# EAGLE board 8iSwitches (EAGLE 6.6.0)
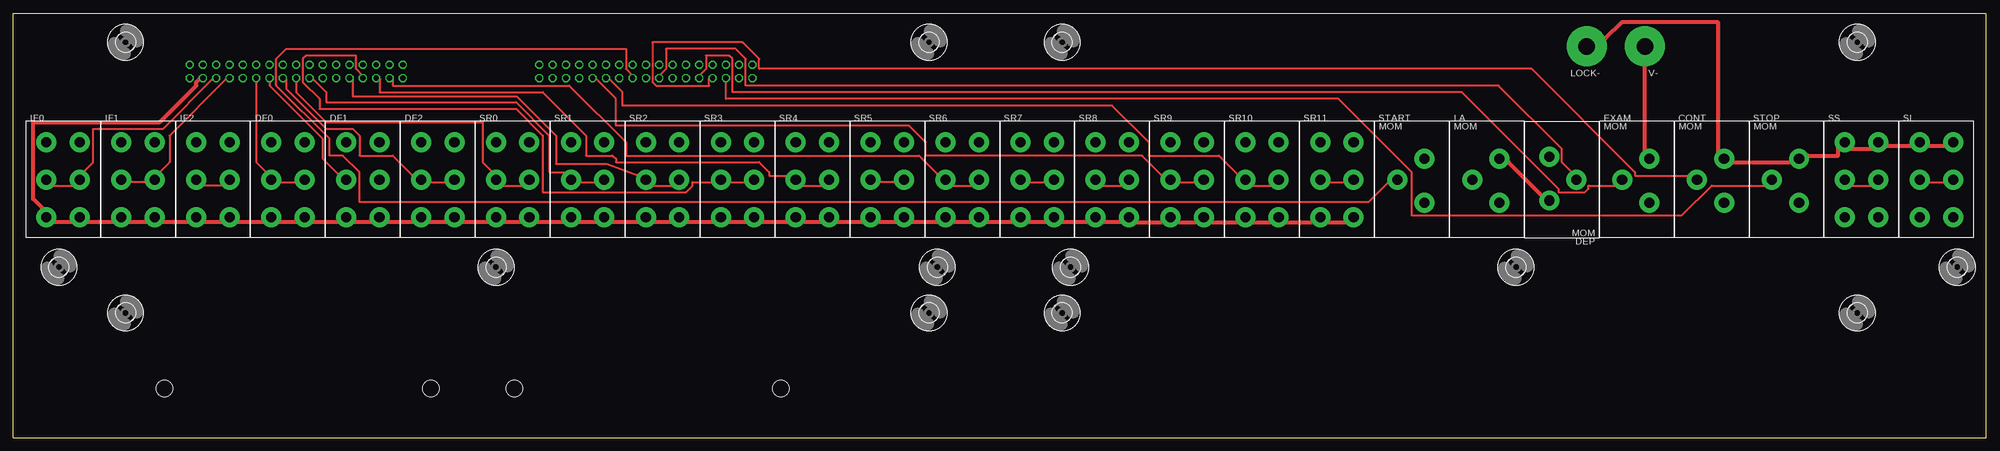
[diagram p0: board, top side]
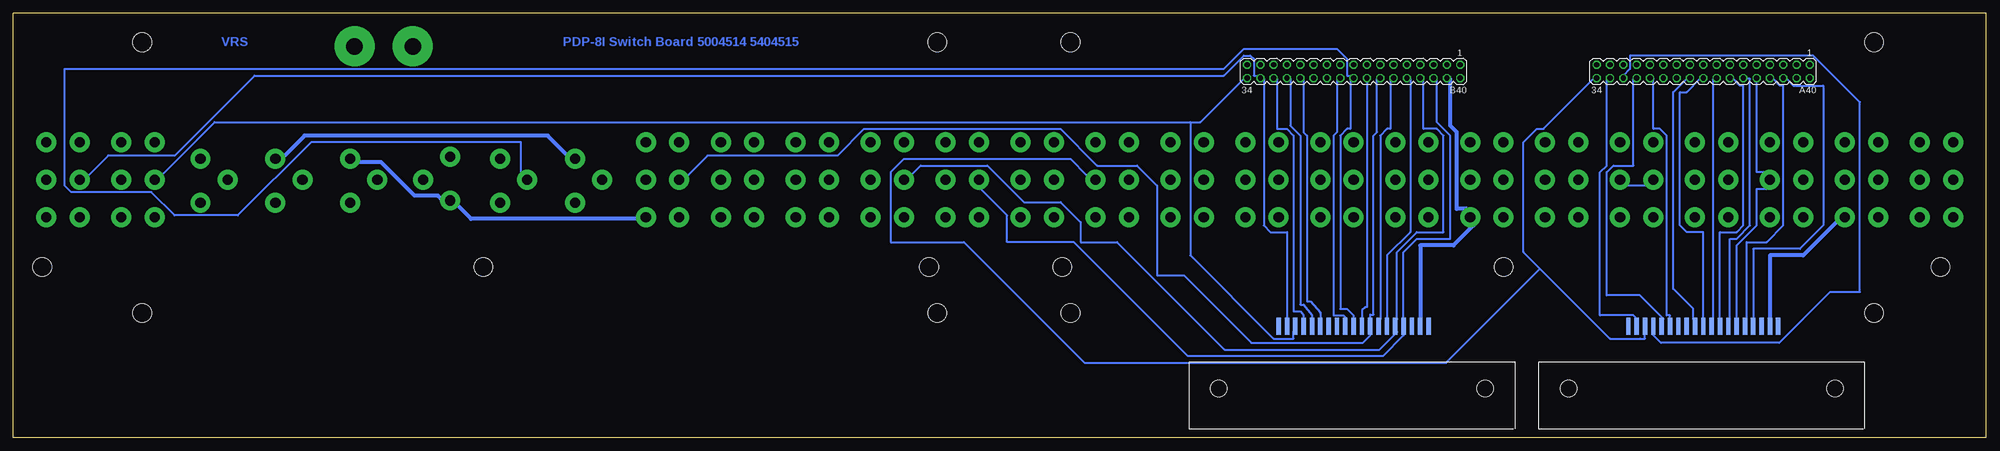
[diagram p1: board, bottom side, seen from below]

Size 376.24 x 80.96 mm. Coordinates in mm from the lower left corner, seen from the top.
Outline: 0,0 0,0
Outline: 0,0 0,0
Outline: 0,0 376.24,0 376.24,80.96 0,80.96 0,0
Copper layers (1*16): Top 0.035mm / dielectric 1.5mm / Bottom 0.035mm
Design rules "15mils": minimum track width 15mil, minimum drill 24mil, track to track 15mil, track to pad 10mil, pad to pad 10mil, via to via 10mil, smd to smd 10mil, copper to edge 25mil, drill to drill 10mil, minimum pad ring 10mil, minimum via ring 8mil, stop-mask expansion 0mil, vias tented up to drill 0mil, thermal gap 10mil
Net classes: 1 supply: width 0.762 mm

## Footprints (pad centres in the part's own frame; a part is rotated, then mirrored left to right if it is on the bottom)
MA17-2 = drill 1.016 octagon: 1 -20.32,-1.27; 2 -20.32,1.27; 3 -17.78,-1.27; 4 -17.78,1.27; 5 -15.24,-1.27; 6 -15.24,1.27; 7 -12.7,-1.27; 8 -12.7,1.27; 9 -10.16,-1.27; 10 -10.16,1.27; 11 -7.62,-1.27; 12 -7.62,1.27; 13 -5.08,-1.27; 14 -5.08,1.27; 15 -2.54,-1.27; 16 -2.54,1.27; 17 0,-1.27; 18 0,1.27; 19 2.54,-1.27; 20 2.54,1.27; 21 5.08,-1.27; 22 5.08,1.27; 23 7.62,-1.27; 24 7.62,1.27; 25 10.16,-1.27; 26 10.16,1.27; 27 12.7,-1.27; 28 12.7,1.27; 29 15.24,-1.27; 30 15.24,1.27; 31 17.78,-1.27; 32 17.78,1.27; 33 20.32,-1.27; 34 20.32,1.27
SPDT8I = drill 1.93 pad 3.81: A1 2.381,3.969; A2 -2.778,0; A3 2.381,-4.366
DPDT8I = drill 1.93 pad 3.81: L1 -3.175,7.144; L2 -3.175,0; L3 -3.175,-7.144; R1 3.175,7.144; R2 3.175,0; R3 3.175,-7.144
FLEX19 = smd 3.175 x 0.838: 1 0,14.287; 2 0,12.7; 3 0,11.113; 4 0,9.525; 5 0,7.938; 6 0,6.35; 7 0,4.763; 8 0,3.175; 9 0,1.587; 10 0,0; 11 0,-1.587; 12 0,-3.175; 13 0,-4.763; 14 0,-6.35; 15 0,-7.938; 16 0,-9.525; 17 0,-11.113; 18 0,-12.7; 19 0,-14.287
SPADELUG = drill 3.175 pad 7.62: 1 0,0
3,6 = hole 3.6: 0,0
STRAIN-RELIEF = hole 3.175: 7.62,56.515; 7.62,5.715

## Placement (x,y rotation side)
A40  [MA17-2]  53.98,69.85 180 bottom
B40  [MA17-2]  120.65,69.85 180 bottom
CONT  SPDT8I  [SPDT8I]  323.85,49.21 0 top
DEP  SPDT8I  [SPDT8I]  295.28,49.21 180 top
DF0  DPDT8I  [DPDT8I]  52.39,49.21 0 top
DF1  DPDT8I  [DPDT8I]  66.68,49.21 0 top
DF2  DPDT8I  [DPDT8I]  80.96,49.21 0 top
EXAM  SPDT8I  [SPDT8I]  309.56,49.21 0 top
FLEXA  FLEX19  [FLEX19]  53.98,21.27 90 bottom
FLEXB  FLEX19  [FLEX19]  120.65,21.27 90 bottom
IF0  DPDT8I  [DPDT8I]  9.53,49.21 0 top
IF1  DPDT8I  [DPDT8I]  23.81,49.21 0 top
IF2  DPDT8I  [DPDT8I]  38.1,49.21 0 top
LA  SPDT8I  [SPDT8I]  280.99,49.21 0 top
LOCK-  LUG  [SPADELUG]  300.04,74.61 180 top
SI  DPDT8I  [DPDT8I]  366.71,49.21 0 top
SR0  DPDT8I  [DPDT8I]  95.25,49.21 0 top
SR1  DPDT8I  [DPDT8I]  109.54,49.21 0 top
SR2  DPDT8I  [DPDT8I]  123.83,49.21 0 top
SR3  DPDT8I  [DPDT8I]  138.11,49.21 0 top
SR4  DPDT8I  [DPDT8I]  152.4,49.21 0 top
SR5  DPDT8I  [DPDT8I]  166.69,49.21 0 top
SR6  DPDT8I  [DPDT8I]  180.98,49.21 0 top
SR7  DPDT8I  [DPDT8I]  195.26,49.21 0 top
SR8  DPDT8I  [DPDT8I]  209.55,49.21 0 top
SR9  DPDT8I  [DPDT8I]  223.84,49.21 0 top
SR10  DPDT8I  [DPDT8I]  238.13,49.21 0 top
SR11  DPDT8I  [DPDT8I]  252.41,49.21 0 top
SS  DPDT8I  [DPDT8I]  352.43,49.21 0 top
START  SPDT8I  [SPDT8I]  266.7,49.21 0 top
STOP  SPDT8I  [SPDT8I]  338.14,49.21 0 top
U$1  [3,6]  201.61,32.54 0 top
U$2  [3,6]  200.03,23.81 0 top
U$3  [3,6]  286.54,32.54 0 top
U$4  [3,6]  200.03,75.41 0 top
U$5  [3,6]  351.63,75.41 0 top
U$6  [3,6]  370.68,32.54 0 top
U$7  [3,6]  351.63,23.81 0 top
U$10  [3,6]  176.21,32.54 0 top
U$11  [3,6]  174.63,23.81 0 top
U$12  [3,6]  174.63,75.41 0 top
U$13  [3,6]  21.43,75.41 0 top
U$14  [3,6]  21.43,23.81 0 top
U$15  [3,6]  8.73,32.54 0 top
U$16  [3,6]  92.08,32.54 0 top
U$17  [STRAIN-RELIEF]  89.85,1.75 90 bottom
U$18  [STRAIN-RELIEF]  23.18,1.75 90 bottom
V-  LUG  [SPADELUG]  311.15,74.61 180 top

## Library data of the parts
A40 B40 = con-lstb; OC_FARNELL: unknown; OC_NEWARK: unknown
CONT DEP DF0 DF1 DF2 EXAM FLEXA FLEXB IF0 IF1 IF2 LA LOCK- SI SR0 SR1-SR11 SS START STOP U$17 U$18 V- = dec-con
U$1-U$7 U$10-U$16 = holes

## Nets
CONT: B40.28 CONT.A2 FLEXB.5
DEP: B40.20 DEP.A2 FLEXB.9
DF0: A40.6 FLEXA.16 IF0.L2 IF0.R2
DF1: A40.8 FLEXA.15 IF1.L2 IF1.R2
DF2: A40.10 FLEXA.14 IF2.L2 IF2.R2
EXAM: B40.26 EXAM.A2 FLEXB.6
IF0: A40.12 DF0.L2 DF0.R2 FLEXA.13
IF1: A40.14 DF1.L2 DF1.R2 FLEXA.12
IF2: A40.16 DF2.L2 DF2.R2 FLEXA.11
LA: B40.18 FLEXB.10 LA.A2
LOCK- [supply]: CONT.A1 LOCK-.1 SI.L1 SI.R1 SS.L1 SS.R1 START.A1 STOP.A1
SI: B40.32 FLEXB.2 SI.L2 SI.R2
SR0: A40.18 FLEXA.10 SR0.L2 SR0.R2
SR1: A40.20 FLEXA.9 SR1.L2 SR1.R2
SR2: A40.26 FLEXA.6 SR2.L2 SR2.R2
SR3: A40.28 FLEXA.5 SR3.L2 SR3.R2
SR4: A40.30 FLEXA.4 SR4.L2 SR4.R2
SR5: A40.34 FLEXA.3 SR5.L2 SR5.R2
SR6: A40.32 FLEXA.2 SR6.L2 SR6.R2
SR7: B40.6 FLEXB.16 SR7.L2 SR7.R2
SR8: B40.8 FLEXB.15 SR8.L2 SR8.R2
SR9: B40.10 FLEXB.14 SR9.L2 SR9.R2
SR10: B40.12 FLEXB.13 SR10.L2 SR10.R2
SR11: B40.14 FLEXB.12 SR11.L2 SR11.R2
SS: B40.34 FLEXB.3 SS.L2 SS.R2
START: B40.16 FLEXB.11 START.A2
STOP: B40.30 FLEXB.4 STOP.A2
V- [supply]: A40.4 B40.4 DEP.A1 DF0.L3 DF0.R3 DF1.L3 DF1.R3 DF2.L3 DF2.R3 EXAM.A1 FLEXA.18 FLEXB.18 IF0.L3 IF0.R3 IF1.L3 IF1.R3 IF2.L3 IF2.R3 LA.A1 SR0.L3 SR0.R3 SR1.L3 SR1.R3 SR2.L3 SR2.R3 SR3.L3 SR3.R3 SR4.L3 SR4.R3 SR5.L3 SR5.R3 SR6.L3 SR6.R3 SR7.L3 SR7.R3 SR8.L3 SR8.R3 SR9.L3 SR9.R3 SR10.L3 SR10.R3 SR11.L3 SR11.R3 V-.1

## Tracks (layer width: path | path; a pad name or v marks a point on that pad's centre or on a via)
CONT
  Top 0.381: CONT.A2 319.41,50.01 309.25,50.01 309.25,50.64 289.56,70.33 142.24,70.33 142.24,72.23 139.07,75.41 121.92,75.41 121.92,67.79 122.56,67.15 132.72,67.15 132.72,68.42 B40.28
  Bottom 0.381: B40.28 132.72,68.42 132.72,59.53 130.81,57.63 130.81,25.4 130.18,25.4 128.59,23.34 FLEXB.5
DEP
  Top 0.381: DEP.A2 297.18,50.64 295.28,52.55 295.28,55.09 283.21,67.15 139.7,67.15 139.7,72.23 137.8,74.14 124.46,74.14 124.46,70.33 123.19,69.06 B40.20
  Bottom 0.381: B40.20 123.83,68.42 123.83,58.26 124.46,57.63 124.46,23.34 122.56,23.34 122.24,23.02 FLEXB.9
DF0
  Top 0.381: A40.6 38.1,68.42 28.58,58.9 15.24,58.9 15.24,52.55 13.34,50.64 IF0.R2 11.43,48.1 7.62,48.1 IF0.L2
  Bottom 0.381: FLEXA.16 44.45,22.7 44.45,36.04 35.56,36.04 31.12,40.48 31.12,67.15 36.83,67.15 38.1,68.42 A40.6
DF1
  Top 0.381: A40.8 40.64,68.42 29.85,57.63 29.85,52.55 27.94,50.64 IF1.R2 25.4,48.74 22.23,48.74 IF1.L2
  Bottom 0.381: FLEXA.15 45.72,22.7 45.72,37.31 41.91,37.31 38.74,40.48 38.74,67.15 39.37,67.15 40.64,68.42 A40.8
DF2
  Top 0.381: IF2.L2 36.2,48.1 40.01,48.1 IF2.R2
  Bottom 0.381: A40.10 43.82,68.42 43.82,50.64 41.91,50.64 IF2.R2 41.91,47.47 43.82,47.47 43.82,40.48 47.63,36.67 47.63,22.7 FLEXA.14
EXAM
  Top 0.381: EXAM.A2 305.44,48.1 300.36,48.1 300.36,47.47 299.72,46.83 294.64,46.83 294.64,47.47 276.23,65.88 137.16,65.88 137.16,72.23 136.53,72.87 132.08,72.87 132.08,70.33 130.81,69.06 B40.26
  Bottom 0.381: B40.26 130.18,68.42 130.18,58.26 129.54,57.63 129.54,26.04 128.91,26.04 127,23.81 127,22.7 FLEXB.6
IF0
  Top 0.381: A40.12 46.36,68.42 46.36,52.55 48.26,50.64 DF0.L2 50.8,48.74 53.98,48.74 DF0.R2
  Bottom 0.381: FLEXA.13 48.9,22.7 48.9,37.94 47.63,37.94 45.09,40.48 45.09,68.42 45.72,68.42 A40.12
IF1
  Top 0.381: A40.14 48.9,68.42 48.9,67.15 59.06,56.99 59.06,53.18 62.23,50.01 DF1.L2
  Bottom 0.381: FLEXA.12 50.8,22.7 50.8,39.21 47.63,39.21 46.36,40.48 46.36,67.15 46.99,67.15 48.26,68.42 A40.14 | DF1.R2 68.58,48.1 64.77,48.1 DF1.L2
IF2
  Top 0.381: DF2.R2 82.55,48.74 79.38,48.74 DF2.L2 76.2,50.01 72.39,53.82 66.04,53.82 66.04,57.63 64.77,58.9 59.69,58.9 52.07,66.52 52.07,68.42 A40.16
  Bottom 0.381: A40.16 52.07,68.42 52.07,22.7 FLEXA.11
LA
  Bottom 0.381: FLEXB.10 120.65,22.7 120.65,23.34 121.92,24.61 123.19,24.61 123.19,57.63 121.92,58.9 121.29,58.9 121.29,68.42 B40.18 120.65,69.06 121.92,69.06 121.92,72.23 123.83,74.14 141.61,74.14 145.42,70.33 366.4,70.33 366.4,48.1 365.13,46.83 349.89,46.83 345.44,42.39 333.38,42.39 319.41,56.36 279.4,56.36 279.4,50.64 LA.A2
LOCK-
  Top 0.762: SI.R1 368.3,55.72 365.13,55.72 SI.L1 361.95,55.72 356.87,55.72 SS.R1 354.33,55.09 350.52,55.09 SS.L1 347.98,55.09 347.98,53.82 342.27,53.82 STOP.A1 339.09,52.55 327.66,52.55 CONT.A1 325.12,54.45 325.12,79.22 306.71,79.22 303.53,76.04 LOCK-.1
  Bottom 0.762: START.A1 270.51,53.82 274.32,57.63 320.68,57.63 324.49,53.82 CONT.A1
SI
  Top 0.381: SI.L2 365.13,48.74 368.3,48.74 SI.R2
  Bottom 0.381: SI.L2 361.95,50.01 358.14,53.82 345.44,53.82 330.2,69.06 145.42,69.06 141.61,72.87 140.34,72.87 139.7,72.23 139.7,69.06 138.43,69.06 B40.32 137.8,68.42 137.8,40.48 136.53,39.21 133.35,39.21 133.35,22.7 FLEXB.2
SR0
  Top 0.381: A40.18 53.98,68.42 53.98,65.88 59.69,60.17 89.54,60.17 89.54,52.55 91.44,50.64 SR0.L2 93.35,48.1 97.16,48.1 SR0.R2
  Bottom 0.381: FLEXA.10 53.98,22.7 53.98,39.21 57.15,39.21 58.42,40.48 58.42,65.88 57.15,65.88 54.61,68.42 A40.18
SR1
  Top 0.381: SR1.R2 111.13,48.74 107.95,48.74 SR1.L2 105.41,50.64 102.24,50.64 102.24,57.63 95.89,63.98 59.69,63.98 59.69,65.88 57.15,68.42 A40.20
  Bottom 0.381: A40.20 57.15,68.42 59.69,65.88 59.69,28.42 55.88,24.61 55.88,22.7 FLEXA.9
SR2
  Top 0.381: SR2.R2 125.73,48.1 121.92,48.1 SR2.L2 119.38,50.01 113.19,52.23 103.51,52.23 103.51,57.63 96.04,65.09 64.77,65.09 64.77,68.42 A40.26
  Bottom 0.381: A40.26 63.5,68.42 63.5,58.9 62.23,58.9 60.96,57.63 60.96,23.34 60.33,23.34 60.33,22.7 FLEXA.6
SR3
  Top 0.381: SR3.R2 139.7,48.74 136.53,48.74 SR3.L2 133.35,48.74 129.54,48.74 129.54,48.1 128.27,46.83 100.97,46.83 100.97,57.63 95.89,62.71 58.42,62.71 58.42,64.61 55.25,67.79 55.25,72.23 55.88,72.87 65.41,72.87 65.41,70.33 66.68,69.06 A40.28
  Bottom 0.381: A40.28 67.31,68.42 67.31,51.91 71.12,51.91 72.39,50.64 72.39,27.15 66.04,27.15 61.6,22.7 FLEXA.5
SR4
  Top 0.381: SR4.R2 154.31,48.1 150.5,48.1 SR4.L2 147.96,50.01 144.15,50.01 144.15,50.64 142.24,52.55 114.94,52.55 114.94,53.18 114.3,53.82 109.22,53.82 109.22,57.63 100.97,65.88 69.85,65.88 69.85,68.42 A40.30
  Bottom 0.381: A40.30 69.22,69.06 67.95,70.33 67.95,72.87 33.02,72.87 24.13,63.98 24.13,27.78 29.85,27.78 39.53,18.1 62.07,18.1 63.5,19.53 63.5,20.16 FLEXA.4
SR5
  Top 0.381: SR5.L2 165.1,48.74 168.28,48.74 SR5.R2
  Bottom 0.381: 85.09,32.23 71.76,18.89 66.04,18.89 65.09,18.89 FLEXA.3 | 85.09,32.23 88.27,35.4 88.27,56.36 85.73,58.9 84.46,58.9 74.93,68.42 A40.34 | 85.09,32.23 103.03,14.29 171.93,14.29 194.95,37.31 208.92,37.31 208.92,50.64 206.38,53.18 174.63,53.18 171.45,50.01 SR5.R2
SR6
  Top 0.381: SR6.R2 182.88,48.1 179.07,48.1 SR6.L2 176.53,50.01 172.72,53.82 116.84,53.82 116.84,56.36 106.05,67.15 72.39,67.15 72.39,68.42 A40.32
  Bottom 0.381: A40.32 72.39,68.42 72.39,51.91 73.66,50.64 73.66,23.34 67.31,23.34 66.68,22.7 FLEXA.2
SR7
  Top 0.381: SR7.L2 193.68,48.74 196.85,48.74 SR7.R2
  Bottom 0.381: B40.6 104.78,68.42 104.78,60.17 102.24,57.63 102.24,37.94 108.59,37.94 111.13,35.4 111.13,22.7 FLEXB.16 111.13,20.16 111.13,19.53 115.09,15.56 152.24,15.56 173.99,37.31 186.69,37.31 186.69,42.39 191.77,47.47 SR7.L2
SR8
  Top 0.381: SR8.L2 207.65,48.1 211.46,48.1 SR8.R2
  Bottom 0.381: B40.8 107.32,68.42 107.32,58.9 104.78,58.9 103.51,57.63 103.51,39.21 108.59,39.21 112.4,35.4 112.4,22.7 FLEXB.15 112.4,20.16 115.73,16.83 145.26,16.83 165.74,37.31 172.72,37.31 172.72,41.12 176.53,44.93 183.52,44.93 190.5,51.91 203.2,51.91 205.11,50.01 SR8.L2
SR9
  Top 0.381: SR9.R2 225.43,48.74 222.25,48.74 SR9.L2 219.08,50.01 215.27,53.82 173.99,53.82 173.99,56.36 170.82,59.53 114.94,59.53 114.94,64.61 111.13,68.42 B40.10
  Bottom 0.381: B40.10 109.86,68.42 109.86,39.21 114.3,34.77 114.3,22.7 FLEXB.14
SR10
  Top 0.381: SR10.R2 240.03,48.1 236.22,48.1 SR10.L2 233.68,50.01 229.87,53.82 216.54,53.82 216.54,56.36 209.55,63.34 116.21,63.34 116.21,65.88 113.67,68.42 B40.12
  Bottom 0.381: B40.12 113.67,68.42 113.67,58.9 114.3,58.9 115.57,57.63 115.57,22.7 FLEXB.13
SR11
  Top 0.381: SR11.L2 250.83,48.74 254,48.74 SR11.R2
  Bottom 0.381: B40.14 116.21,68.42 116.21,58.26 116.84,57.63 116.84,23.5 117.48,23.5 FLEXB.12 117.48,20.16 117.48,19.53 118.9,18.1 140.18,18.1 153.04,30.96 158.12,30.96 158.12,48.1 161.93,51.91 169.55,51.91 176.53,58.9 214,58.9 219.08,53.82 243.84,53.82 247.65,50.01 SR11.L2
SS
  Top 0.381: SS.R2 354.33,48.1 350.52,48.1 SS.L2
  Bottom 0.381: 151.77,60.17 337.82,60.17 347.98,50.01 SS.L2 | 151.77,60.17 149.86,60.17 141.61,68.42 B40.34 | 151.77,60.17 151.77,34.77 135.89,18.89 132.08,18.89 132.08,20.16 FLEXB.3
START
  Top 0.381: START.A2 262.26,48.74 258.45,44.93 66.04,44.93 66.04,50.64 62.87,53.82 60.33,53.82 60.33,56.99 50.17,67.15 50.17,72.23 52.07,74.14 116.84,74.14 116.84,70.33 118.11,69.06 B40.16
  Bottom 0.381: B40.16 118.11,68.42 118.11,24.92 118.43,24.92 119.06,24.29 FLEXB.11
STOP
  Top 0.381: STOP.A2 334.01,48.1 323.85,48.1 318.14,42.39 266.7,42.39 266.7,50.64 252.73,64.61 135.89,64.61 135.89,68.42 B40.30
  Bottom 0.381: B40.30 135.26,68.42 135.26,58.9 133.35,58.9 132.08,57.63 132.08,24.13 130.81,24.13 130.18,23.34 FLEXB.4
V-
  Top 0.762: A40.4 35.56,68.42 34.93,67.79 34.93,67.15 27.94,60.17 3.81,60.17 3.81,45.56 5.72,43.66 IF0.L3 7.62,41.12 11.43,41.12 IF0.R3 13.97,41.12 19.05,41.12 IF1.L3 22.23,41.12 25.4,41.12 IF1.R3 28.58,41.12 33.66,41.12 IF2.L3 36.2,41.12 40.01,41.12 IF2.R3 42.55,41.12 47.63,41.12 DF0.L3 50.8,41.12 53.98,41.12 DF0.R3 57.15,41.12 62.23,41.12 DF1.L3 64.77,41.12 68.58,41.12 DF1.R3 71.12,41.12 76.2,41.12 DF2.L3 79.38,41.12 82.55,41.12 DF2.R3 85.73,41.12 90.81,41.12 SR0.L3 93.35,41.12 97.16,41.12 SR0.R3 99.7,41.12 104.78,41.12 SR1.L3 107.95,41.12 111.13,41.12 SR1.R3 114.3,41.12 119.38,41.12 SR2.L3 121.92,41.12 125.73,41.12 SR2.R3 128.27,41.12 133.35,41.12 SR3.L3 136.53,41.12 139.7,41.12 SR3.R3 142.88,41.12 147.96,41.12 SR4.L3 150.5,41.12 154.31,41.12 SR4.R3 156.85,41.12 161.93,41.12 SR5.L3 165.1,41.12 168.28,41.12 SR5.R3 171.45,41.12 176.53,41.12 SR6.L3 179.07,41.12 182.88,41.12 SR6.R3 185.42,41.12 190.5,41.12 SR7.L3 193.68,41.12 196.85,41.12 SR7.R3 200.03,41.12 205.11,41.12 SR8.L3 207.65,41.12 211.46,41.12 SR8.R3 214,41.12 219.08,41.12 SR9.L3 222.25,41.12 225.43,41.12 SR9.R3 228.6,41.12 233.68,41.12 SR10.L3 236.22,41.12 240.03,41.12 SR10.R3 242.57,41.12 247.65,41.12 SR11.L3 250.83,41.12 254,41.12 SR11.R3 | DEP.A1 291.47,46.2 285.12,52.55 LA.A1 | EXAM.A1 311.15,54.45 311.15,70.96 V-.1
  Bottom 0.762: FLEXA.18 41.28,22.7 41.28,34.77 34.93,34.77 28.58,41.12 IF1.R3 | EXAM.A1 310.52,52.55 306.07,52.55 299.72,46.2 295.28,46.2 294.64,45.56 DEP.A1 291.47,44.29 288.93,41.75 257.18,41.75 SR11.R3 | B40.4 102.24,68.42 102.24,59.53 100.97,58.26 100.97,43.66 99.06,43.66 SR0.R3 97.79,40.48 101.6,36.67 107.95,36.67 107.95,22.7 FLEXB.18

## Text on the board
Bottom: PDP-8I Switch Board 5004514 5404515 | VRS